# Altium PCB temperture.PcbDoc (part 1 of 2)
Units mil, origin at the board's own origin, x right, y up, seen from the top; angles counter-clockwise.
Board outline 9600 x 6010 mil, 2 copper layers (Top Layer, Bottom Layer); 151 components, 110 nets, 697 pads, 117 vias.
Unrouted connection lines stored in the file: 3.
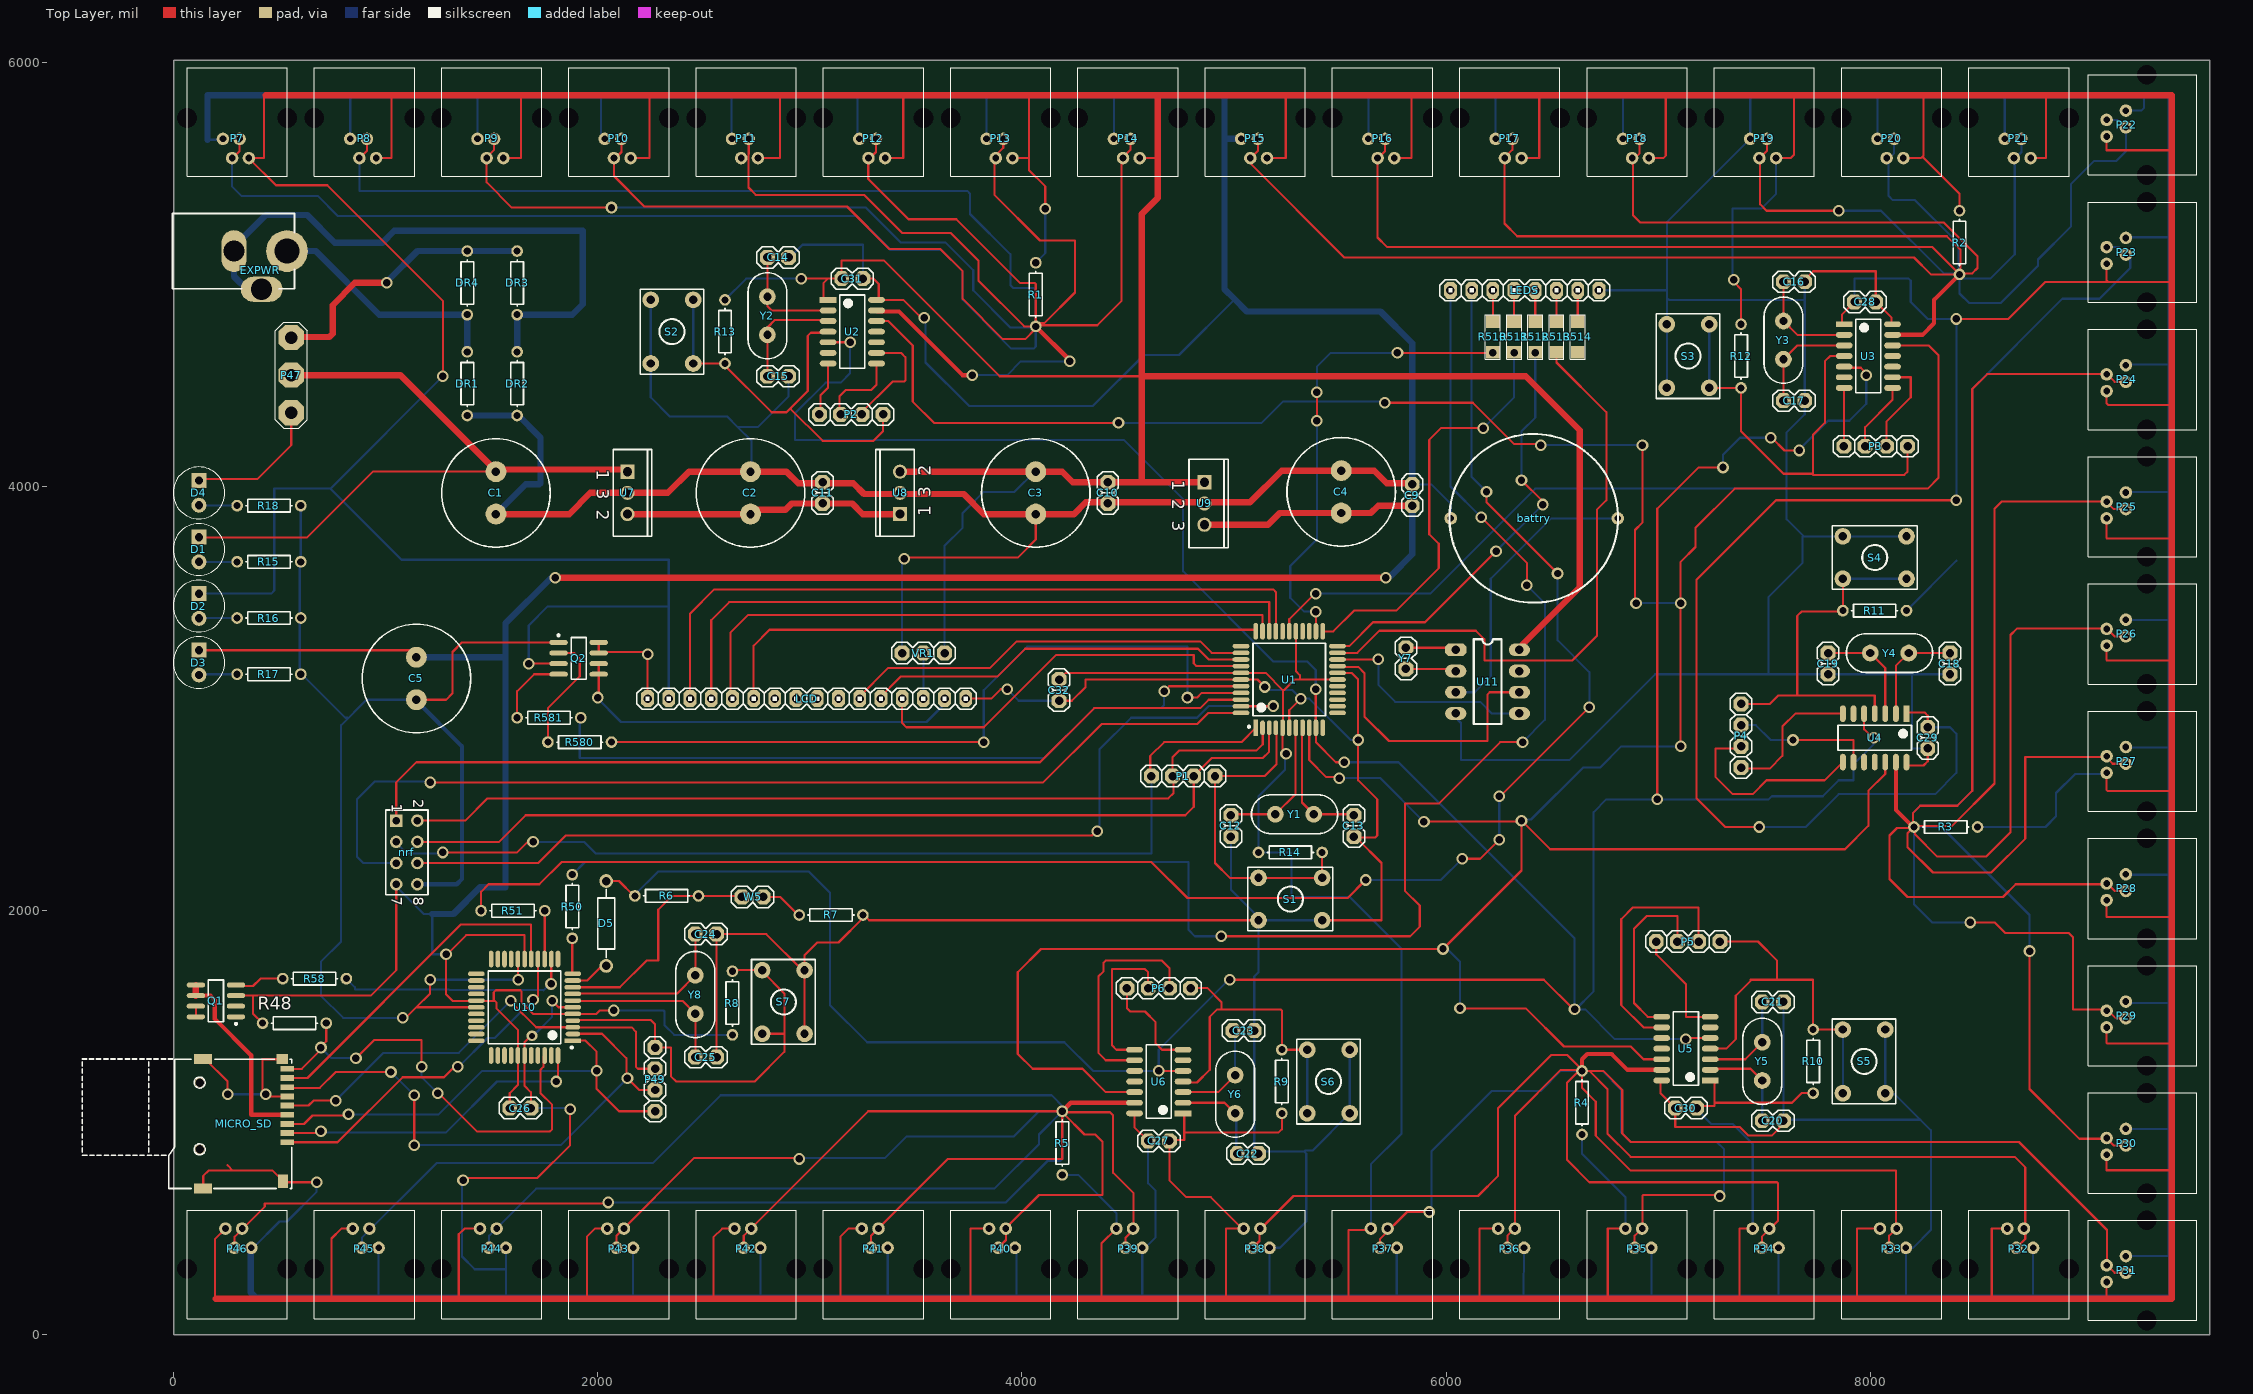
[diagram p0: Top Layer view]
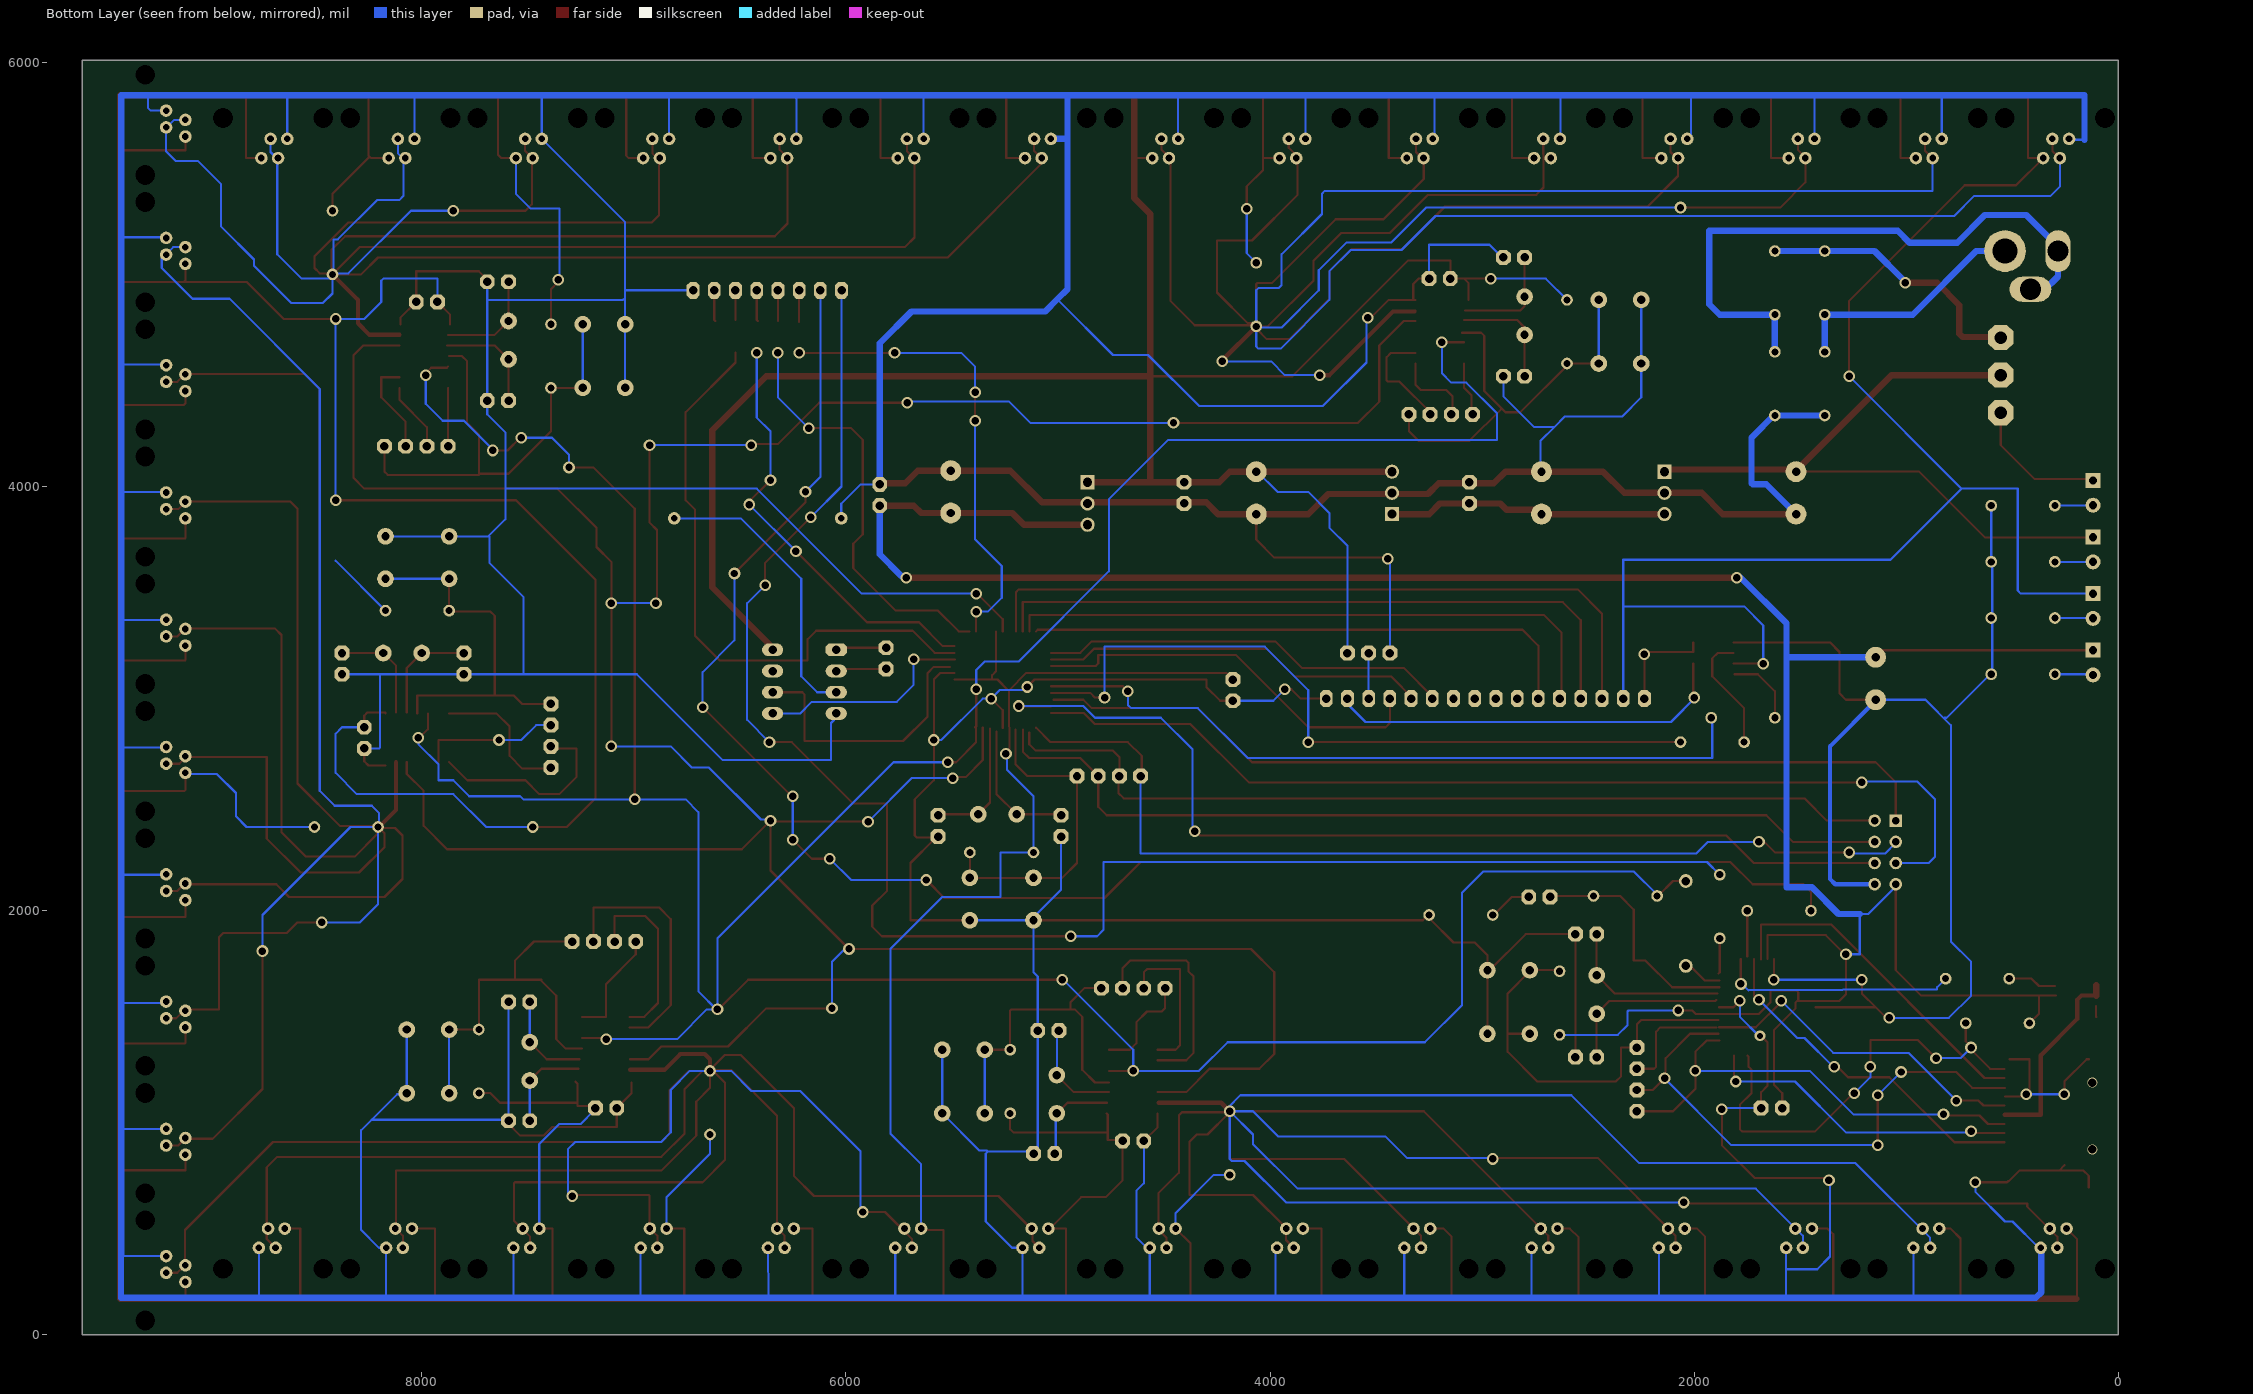
[diagram p1: Bottom Layer view, seen from below]

## Layer stack, top to bottom
Top Layer: signal copper 1.4
Dielectric: dielectric 12.6, FR-4, Dk 4.8
Bottom Layer: signal copper 1.4

## Board outline
0,0 9600,0 9600,6010 0,6010

## Design rules (kind name [scope] priority, off if disabled: settings)
Clearance [All] p1: gap=10
FabricationTestPointUsage TestPointUsage [All] p1: valid=0 allowmultiple=FALSE
FabricationTestpoint Testpoint [(IsPad And (OnTopLayer Or OnBottomLayer))] p1: side=3 testpointundercomponent=TRUE minsize=40 maxsize=100 preferedsize=60 minholesize=0 maxholesize=40 preferedholesize=32 testpointgrid=1 allowsidetop=TRUE allowsidebottom=TRUE usegrid=TRUE gridtolerance=0.01
PolygonConnect [All] p1: connectstyle=Relief reliefconductorwidth=10 reliefentries=4 polygonreliefangle="90 Angle" airgapwidth=10
RoutingVias [All] p1: holewidth=28 width=50 viastyle="Through Hole" minholewidth=28 minwidth=50 maxholewidth=28 maxwidth=50
SilkToSolderMaskClearance SilkscreenOverComponentPads [IsPad] p1: minsilkscreentomaskgap=10 clearancetoexposedcopper=TRUE
SolderMaskExpansion [All] p1: expansion=4
Width [All] p1: maxlimit=10 minlimit=10 preferedwidth=10
25 further rules are at their usual default settings.

## Components (designator, comment, footprint, x,y, rotation, side; value= is the part's Value field where it differs from the comment)
battry "Header 2" Battry 6415,3850 r0 top
C1 "Cap2" cap 1520,3970 r270 top
C2 "Cap2" cap 2720,3970 r90 top
C3 "Cap2" cap 4065,3970 r270 top
C4 "Cap2" cap 5505,3975 r90 top
C5 "Cap2" cap 1145,3095 r270 top
C9 "Cap" H1X02F 5840,3960 r90 top
C10 "Cap" H1X02F 4405,3970 r270 top
C11 "Cap" H1X02F 3060,3970 r90 top
C12 "Cap" H1X02F 4985,2400 r270 top
C13 "Cap" H1X02F 5565,2400 r270 top
C14 "Cap" H1X02F 2850,5080 r0 top
C15 "Cap" H1X02F 2850,4520 r0 top
C16 "Cap" H1X02F 7640,4965 r0 top
C17 "Cap" H1X02F 7640,4405 r0 top
C18 "Cap" H1X02F 8375,3165 r270 top
C19 "Cap" H1X02F 7800,3165 r270 top
C20 "Cap" H1X02F 7540,1010 r0 top
C21 "Cap" H1X02F 7540,1570 r0 top
C22 "Cap" H1X02F 5065,855 r0 top
C23 "Cap" H1X02F 5045,1435 r0 top
C24 "Cap" H1X02F 2510,1890 r0 top
C25 "Cap" H1X02F 2510,1310 r0 top
C26 "Cap" H1X02F 1635,1070 r0 top
C27 "Cap" H1X02F 4645,915 r180 top
C28 "Cap" H1X02F 7975,4870 r0 top
C29 "Cap" H1X02F 8270,2815 r270 top
C30 "Cap" H1X02F 7130,1070 r180 top
C31 "Cap" H1X02F 3200,4980 r0 top
C32 "Cap" H1X02F 4175,3040 r270 top
D1 "LED0" LED5mm 120,3703.33 r270 top
D2 "LED0" LED5mm 120,3436.67 r270 top
D3 "LED0" LED5mm 120,3170 r270 top
D4 "LED0" LED5mm 120,3970 r270 top
D5 "LED0" AXIAL-0.4 2040,1940 r90 top
DR1 "LED0" AXIAL-0.3 1385,4485 r90 top
DR2 "LED0" AXIAL-0.3 1620,4485 r90 top
DR3 "LED0" AXIAL-0.3 1620,4960 r90 top
DR4 "LED0" AXIAL-0.3 1385,4960 r90 top
EXPWR "PWR2.5" JACK1 410,5020 r0 top
LCD "Header 16" H1X16F 2985,3000 r180 top
LEDS "Header 8" H1X08F 6370,4925 r0 top
MICRO_SD "MicroSD" MicroSD_1 330,995 r270 top
nrf "Header 4X2" HDR2X4 1050,2425 r270 top
P1 "Header 4" H1X04F 4760,2635 r0 top
P2 "Header 4" H1X04F 3195,4340 r0 top
P3 "Header 4" H1X04F 8025,4190 r0 top
P4 "Header 4" H1X04F 7390,2825 r90 top
P5 "Header 4" H1X04F 7140,1855 r0 top
P6 "Header 4" H1X04F 4645,1635 r0 top
P7 "Header 4" RJ11 300,5635 r0 top
P8 "Header 4" RJ11 900,5635 r0 top
P9 "Header 4" RJ11 1500,5635 r0 top
P10 "Header 4" RJ11 2100,5635 r0 top
P11 "Header 4" RJ11 2700,5635 r0 top
P12 "Header 4" RJ11 3300,5635 r0 top
P13 "Header 4" RJ11 3900,5635 r0 top
P14 "Header 4" RJ11 4500,5635 r0 top
P15 "Header 4" RJ11 5100,5635 r0 top
P16 "Header 4" RJ11 5700,5635 r0 top
P17 "Header 4" RJ11 6300,5635 r0 top
P18 "Header 4" RJ11 6900,5635 r0 top
P19 "Header 4" RJ11 7500,5635 r0 top
P20 "Header 4" RJ11 8100,5635 r0 top
P21 "Header 4" RJ11 8700,5635 r0 top
P22 "Header 4" RJ11 9200,5705 r270 top
P23 "Header 4" RJ11 9200,5105 r270 top
P24 "Header 4" RJ11 9200,4505 r270 top
P25 "Header 4" RJ11 9200,3905 r270 top
P26 "Header 4" RJ11 9200,3305 r270 top
P27 "Header 4" RJ11 9200,2705 r270 top
P28 "Header 4" RJ11 9200,2105 r270 top
P29 "Header 4" RJ11 9200,1505 r270 top
P30 "Header 4" RJ11 9200,905 r270 top
P31 "Header 4" RJ11 9200,305 r270 top
P32 "Header 4" RJ11 8700,415 r180 top
P33 "Header 4" RJ11 8100,415 r180 top
P34 "Header 4" RJ11 7500,415 r180 top
P35 "Header 4" RJ11 6900,415 r180 top
P36 "Header 4" RJ11 6300,415 r180 top
P37 "Header 4" RJ11 5700,415 r180 top
P38 "Header 4" RJ11 5100,415 r180 top
P39 "Header 4" RJ11 4500,415 r180 top
P40 "Header 4" RJ11 3900,415 r180 top
P41 "Header 4" RJ11 3300,415 r180 top
P42 "Header 4" RJ11 2700,415 r180 top
P43 "Header 4" RJ11 2100,415 r180 top
P44 "Header 4" RJ11 1500,415 r180 top
P45 "Header 4" RJ11 900,415 r180 top
P46 "Header 4" RJ11 300,415 r180 top
P47 "switch" peymanswitch 555,4525 r270 top
P49 "Header 4" H1X04F 2270,1205 r90 top
Q1 "IRF7317" SO-8_N 200,1575 r180 top
Q2 "IRF7317" SO-8_N 1910,3190 r0 top
R1 "Res1" AXIAL-0.3 4065,4905 r90 top
R2 "Res1" AXIAL-0.3 8420,5150 r90 top
R3 "Res1" AXIAL-0.3 8355,2395 r0 top
R4 "Res1" AXIAL-0.3 6640,1095 r270 top
R5 "Res1" AXIAL-0.3 4190,905 r270 top
R6 "Res1" AXIAL-0.3 2325,2070 r0 top
R7 "Res1" AXIAL-0.3 3100,1980 r0 top
R8 "Res1" AXIAL-0.3 2635,1565 r90 top
R9 "Res1" AXIAL-0.3 5225,1195 r270 top
R10 "Res1" AXIAL-0.3 7730,1290 r270 top
R11 "Res1" AXIAL-0.3 8020,3415 r0 top
R12 "Res1" AXIAL-0.3 7390,4615 r90 top
R13 "Res1" AXIAL-0.3 2600,4730 r90 top
R14 "Res1" AXIAL-0.3 5265,2275 r0 top
R15 "Res1" AXIAL-0.3 450,3645 r180 top
R16 "Res1" AXIAL-0.3 450,3380 r180 top
R17 "Res1" AXIAL-0.3 450,3115 r180 top
R18 "Res1" AXIAL-0.3 450,3910 r180 top
R48 "Res1" AXIAL-0.3 570,1470 r0 top
R50 "Res1" AXIAL-0.3 1880,2020 r90 top
R51 "Res1" AXIAL-0.3 1600,2000 r180 top
R58 "Res1" AXIAL-0.3 665,1680 r180 top
R510 "Res1" SMD[1206] 6220,4705 r90 top
R511 "Res1" SMD[1206] 6320,4705 r90 top
R512 "Res1" SMD[1206] 6420,4705 r90 top
R513 "Res1" SMD[1206] 6520,4705 r90 top
R514 "Res1" SMD[1206] 6620,4705 r90 top
R580 "Res1" AXIAL-0.3 1915,2795 r180 top
R581 "Res1" AXIAL-0.3 1770,2910 r180 top
S1 "SW-PB" PB4 5265,2055 r270 top
S2 "SW-PB" PB4 2350,4730 r0 top
S3 "SW-PB" PB4 7140,4615 r0 top
S4 "SW-PB" PB4 8020,3665 r270 top
S5 "SW-PB" PB4 7970,1290 r180 top
S6 "SW-PB" PB4 5445,1195 r0 top
S7 "SW-PB" PB4 2875,1570 r180 top
U1 "ATmega32-16AC" TQFP44 5260,3090 r90 top
U2 "ATtiny24V-10SSU" SOIC14 3200,4730 r0 top
U3 "ATtiny24V-10SSU" SOIC14 7990,4615 r0 top
U4 "ATtiny24V-10SSU" SOIC14 8020,2815 r270 top
U5 "ATtiny24V-10SSU" SOIC14 7130,1350 r180 top
U6 "ATtiny24V-10SSU" SOIC14 4645,1195 r180 top
U7 "L7809ABV" TO220ABN 2140,3970 r270 top
U8 "L7805ABV" TO220ABN 3425,3970 r90 top
U9 "LF33ABV" TO-220A 4860,3920 r270 top
U10 "ATmega32-16AC" TQFP44 1655,1545 r180 top
U11 "ds1307" DIP8-1 6195,3080 r0 top
VR1 "Res Tap" H1X03F 3535,3215 r0 top
W5 "Jumper" H1X02F 2730,2065 r180 top
Y1 "XTAL" CRYSTALL 5285,2455 r180 top
Y2 "XTAL" CRYSTALL 2800,4805 r90 top
Y3 "XTAL" CRYSTALL 7590,4690 r90 top
Y4 "XTAL" CRYSTALL 8090,3215 r0 top
Y5 "XTAL" CRYSTALL 7490,1290 r270 top
Y6 "XTAL" CRYSTALL 5005,1135 r270 top
Y7 "XTAL" H1X02F 5810,3190 r270 top
Y8 "XTAL" CRYSTALL 2460,1605 r270 top

## Footprints (in the part's own frame and the unit in brackets; to place one, negate y for a bottom-side part, rotate by r counter-clockwise, add the part's x,y. Pads: shape width x height; smd on the part's side, far side on the other; paste and mask are expansions set on the pad)
AXIAL-0.3 [mm] "Axial Device, Thru-Hole; 2 Leads; 0.3 in Pin Spacing"
  round 1.4 hole 0.85: 1(-3.81,0) 2(3.81,0)
  silkscreen extent -2.77,-0.76 2.77,0.76
AXIAL-0.4 [mil]
  round 65 hole 40: 1(-200,0) 2(200,0)
  silkscreen extent -160,-40 160,40
Battry [mil]
  round 59.06 hole 30: 1(393.7,0)
  round 60 hole 30: 2(-393.7,0)
  silkscreen extent -400,-398 395,398
cap [mm]
  round 2.5 hole 1: 1(-2.54,0) 2(2.54,0)
  silkscreen extent -6.5,-6.5 6.5,6.5
CRYSTALL [mm]
  round 2 hole 1: 1(-2.293,0) 2(2.293,0)
  silkscreen extent -5.16,-2.32 5.16,2.32
DIP8-1 [mil]
  oct 100x60 hole 40: 1(-150,150)
  oval 100x60 hole 40: 2(-150,50) 3(-150,-50) 4(-150,-150) 5(150,-150) 6(150,-50) 7(150,50) 8(150,150)
  silkscreen extent -65,-200 65,200
H1X02F [mil]
  oct 70x70 hole 40: 1(-50,0) 2(50,0)
  silkscreen extent -100,-50 100,50
H1X03F [mil]
  oct 70x70 hole 40: 1(-100,0) 2(0,0) 3(100,0)
  silkscreen extent -150,-50 150,50
H1X04F [mil]
  oct 70x70 hole 40: 1(-150,0) 2(-50,0) 3(50,0) 4(150,0)
  silkscreen extent -200,-50 200,50
H1X08F [mil]
  oct 60x80 hole 40: 1(-350,0) 2(-250,0) 3(-150,0) 4(-50,0) 5(50,0) 6(150,0) 7(250,0) 8(350,0)
  silkscreen extent -400,-50 400,50
H1X16F [mil]
  oct 60x80 hole 40: 1(-750,0) 2(-650,0) 3(-550,0) 4(-450,0) 5(-350,0) 6(-250,0) 7(-150,0) 8(-50,0) 9(50,0) 10(150,0) 11(250,0) 12(350,0) 13(450,0) 14(550,0) 15(650,0) 16(750,0)
  silkscreen extent -800,-50 800,50
HDR2X4 [mm] "Connector; Header; 4x2 Position"
  rect 1.5x1.5 hole 0.9: 1(0,0)
  round 1.5 hole 0.9: 2(0,2.54) 3(2.54,0) 4(2.54,2.54) 5(5.08,0) 6(5.08,2.54) 7(7.62,0) 8(7.62,2.54)
  silkscreen extent -1.27,-1.27 8.89,3.81
JACK1 [mm]
  round 5 hole 3: 1(3.175,2.286)
  oval 3x5 hole 2.54: 2(-3.175,2.286)
  oval 5x3 hole 2.54: 3(0.127,-2.286)
  silkscreen extent -10.52,-2.21 4.07,6.79
LED5mm [mm]
  rect 1.8x1.8 hole 1: 1(-1.479,0)
  round 1.8 hole 1: 2(1.48,0)
  silkscreen extent -3.1,-3.1 3.1,3.1
MicroSD_1 [mm]
  round 1.2 hole 1: 0(-4.95,-5.25) 0(3.05,-5.25)
  rect 0.7x1.6 smd: 1(2.2,5.25) 2(1.1,5.25) 3(0,5.25) 4(-1.1,5.25) 5(-2.2,5.25) 6(-3.3,5.25) 7(-4.4,5.25) 8(-5.5,5.25) 9(-6.6,5.25)
  rect 1.2x1.4 smd: sh1(-7.75,4.65)
  rect 1.2x2.2 smd: sh2(-7.75,-4.85) sh3(7.75,-4.85)
  rect 1.6x1.2 smd: sh4(6.85,4.75)
  silkscreen extent -7.77,-19.32 7.74,5.77
PB4 [mm]
  round 2 hole 1: 1(2.54,3.81) 1(2.54,-3.81) 2(-2.54,3.81) 2(-2.54,-3.81)
  silkscreen extent -3.81,-5.08 3.81,5.08
peymanswitch [mm]
  oct 3x3 hole 1.5: 1(-4.5,0) 2(0,0) 3(4.5,0)
  silkscreen extent -6.35,-1.91 6.35,1.91
RJ11 [mm]
  round 1.5 hole 0.8: 1(1.4,-2.2) 2(0.3,0.1) 3(-0.6,-2.2) 4(-1.7,0.1)
  round 0 hole 2.36 unplated: shild(-6,2.6) shild(6,2.6)
  silkscreen extent -6,-4.4 6,8.6
SMD[1206] [mil]
  rect 60x65 smd: 1(-72.5,0) 2(72.5,0)
  silkscreen extent -105,-35 105,35
SO-8_N [mm] "SOIC, 8-Leads, Body 4.9x3.9mm, Pitch 1.27mm, IPC Medium Density"
  oval 2.2x0.6 smd: 1(-2.4,1.905) 2(-2.4,0.635) 3(-2.4,-0.635) 4(-2.4,-1.905) 5(2.4,-1.905) 6(2.4,-0.635) 7(2.4,0.635) 8(2.4,1.905)
  silkscreen extent -2.53,-2.5 0.9,2.88, body extent -1.95,-2.45 1.95,2.45, height 1.75
SOIC14 [mm]
  rect 2x0.7 smd: 1(-2.9,3.81)
  oval 2x0.7 smd: 2(-2.9,2.54) 3(-2.9,1.27) 4(-2.9,0) 5(-2.9,-1.27) 6(-2.9,-2.54) 7(-2.9,-3.81) 8(2.9,-3.81) 9(2.9,-2.54) 10(2.9,-1.27) 11(2.9,0) 12(2.9,1.27) 13(2.9,2.54) 14(2.9,3.81)
  silkscreen extent -1.5,-4.4 1.5,4.4, body extent -2,-4.38 2,4.38, height 1.73
TO220ABN [mm] "TO, Thru-Hole, Vertical, Heatsink Mounted; 3 In-Line Leads; Pitch 2.54 mm; Pin sequence 1, 3, 2"
  rect 1.7x1.7 hole 1.1: 1(-2.54,0)
  round 1.7 hole 1.1: 2(2.54,0) 3(0,0)
  silkscreen extent -5.2,-1.7 5.2,2.9
TO-220A [mm] "TO, Thru-Hole, Vertical, Heatsink Mounted; 3 In-Line Leads; Pitch 2.54 mm"
  rect 1.7x1.7 hole 1.1: 1(-2.54,0)
  round 1.7 hole 1.1: 2(0,0) 3(2.54,0)
  silkscreen extent -5.3,-1.85 5.3,2.85
TQFP44 [mm]
  rect 2x0.55 smd: 1(-5.775,4)
  oval 1.75x0.55 smd: 2(-5.775,3.2) 3(-5.775,2.4) 4(-5.775,1.6)
  oval 2x0.55 smd: 5(-5.775,0.8) 6(-5.775,0) 7(-5.775,-0.8) 8(-5.775,-1.6) 9(-5.775,-2.4) 10(-5.775,-3.2) 11(-5.775,-4) 23(5.775,-4) 24(5.775,-3.2) 25(5.775,-2.4) 26(5.775,-1.6) 27(5.775,-0.8) 28(5.775,0) 29(5.775,0.8) 30(5.775,1.6) 31(5.775,2.4) 32(5.775,3.2) 33(5.775,4)
  oval 0.55x2 smd: 12(-4,-5.775) 13(-3.2,-5.775) 14(-2.4,-5.775) 15(-1.6,-5.775) 16(-0.8,-5.775) 17(0,-5.775) 18(0.8,-5.775) 19(1.6,-5.775) 20(2.4,-5.775) 21(3.2,-5.775) 22(4,-5.775) 34(4,5.775) 35(3.2,5.775) 36(2.4,5.775) 37(1.6,5.775) 38(0.8,5.775) 39(0,5.775) 40(-0.8,5.775) 41(-1.6,5.775) 42(-2.4,5.775) 43(-3.2,5.775) 44(-4,5.775)
  silkscreen extent -5.77,-4.35 4.35,4.95, body extent -5,-5 5,5, height 1.2

## Part data
battry: "Header, 2-Pin"
C1 C2 C3 C4 C5 C9 C10 C11 C12 C13 C14 C15 C16 C17 C18 C19 C20 C21 C22 C23 C24 C25 C26 C27 C28 C29 C30 C31 C32: "Capacitor"
D1 D2 D3 D4 D5 DR1 DR2 DR3 DR4: "Typical INFRARED GaAs LED"
EXPWR: "Low Voltage Power Supply Connector"
LCD: "Header, 16-Pin"
LEDS: "Header, 8-Pin"
MICRO_SD: "MicroSD_altium designer (M.Hariri)"
nrf: "Header, 4-Pin, Dual row"
P1 P2 P3 P4 P5 P6 P7 P8 P9 P10 P11 P12 P13 P14 P15 P16 P17 P18 P19 P20 P21 P22 P23 P24 P25 P26 P27 P28 P29 P30 P31 P32 P33 P34 P35 P36 P37 P38 P39 P40 P41 P42 P43 P44 P45 P46 P49: "Header, 4-Pin"
P47: library part "Header 3", "Header, 3-Pin"
Q1 Q2: "HEXFET Power MOSFET"
R1 R2 R3 R4 R5 R6 R7 R8 R9 R10 R11 R12 R13 R14 R15 R16 R17 R18 R48 R50 R51 R58 R510 R511 R512 R513 R514 R580 R581: "Resistor"
S1 S2 S3 S4 S5 S6 S7: "Switch"
U1 U10: "8-Bit AVR Microcontroller with 32K Bytes of In-System Programmable Flash Memory"
U2 U3 U4 U5 U6: "8-bit AVR Microcontroller, 1.8-5.5V, 2KB Flash, 128 Bytes EEPROM, 128 Bytes SRAM, 14-pin SOIC, Industrial Grade (-40°C to 85°C), Pb-Free"
U7 U8: "Precision 1A Regulator"
U9: "500mA, Very Low Drop (0.45V) Voltage Regulator"
U11: library part Attiny85, "Attiny45"
VR1: "Tapped Resistor"
W5: "Jumper Wire"
Y1 Y2 Y3 Y4 Y5 Y6 Y7 Y8: "Crystal Oscillator"

## Via types
v1: diameter 55, hole 35, Top Layer to Bottom Layer, 116 vias
v2: diameter 50, hole 28, Top Layer to Bottom Layer, 1 vias

## Nets (pads, with @x,y where several pads share a name; then routed paths per layer and width w, separated by ;. In a path a pad name is that pad's centre, name@x,y a point inside that pad or via, vN(x,y) a via of type N, cw(c..) or ccw(c..) an arc to the next point about the centre after c; other vN are vias at no path point)
3.3: C4.1 C5.1 C9.1 C26.1 D3.1 nrf.7 Q1.3 R8.1 R48.1 U9.3 U10.5 U10.17 U10.27 U10.38 | length 13338.2
  Top Layer w10: D3.1@120,3228.25 1116.75,3228.25 C5.1@1140,3205 ; Q1.3@294.49,1600 375,1600 ; R48.1@420,1470 375,1515 375,1600 ; nrf.7@1050,2110 1050,1720 930,1600 375,1600 ; v1(1285,1795) 1285,1605 1315,1575 1510,1575 ; v1@1295,1800 1380,1885 1655,1885 U10.17@1655,1772.36 ; C26.1@1585,1070 1585,1140 1623.5,1178.5 U10.38@1623.5,1317.64 1623.5,1438.5 1522.01,1540 1522.01,1567.99 1515,1575 1510,1575 ; v1@2060,1530 2010,1530 1993.5,1513.5 U10.5@1882.36,1513.5 1696.5,1513.5 1640,1570 1640,1620 1635,1625 1520,1625 1510,1615 1510,1575
  Top Layer w30: v1@1815,3570 v1@5695,3570 ; U9.3@4860,3820 5160,3820 5215,3875 C4.1@5505,3875 5645,3875 5680,3910 C9.1@5830,3910
  Bottom Layer w10: nrf.7@1032.5,2132.5 1180,1985 1220,1985 1220,1795 v1(1285,1795) ; 1555,3195 1560,3190 ; v1@2085,1530 2310,1530 2315,1525 2315,1460 2360,1415 R8.1@2635,1415 ; C9.1@5840,3910 C9.1@5855,3895
  Bottom Layer w30: C5.1@1145,3195 1555,3195 ; 1220,1985 1320,1985 1445,2110 1565,2110 1565,3355 v1@1780,3570 ; v1@5740,3580 5840,3680 C9.1@5840,3910
  other v1: 2075,1530 1800,3570 5715,3570
5: C3.1 C10.1 C27.1 C28.1 C29.1 C30.1 C31.1 C32.1 D2.1 LCD.15 P7.1 P8.1 P9.1 P10.1 P11.1 P12.1 P13.1 P14.1 P15.1 P16.1 P17.1 P18.1 P19.1 P20.1 P21.1 P22.1 P23.1 P24.1 P25.1 P26.1 P27.1 P28.1 P29.1 P30.1 P31.1 P32.1 P33.1 P34.1 P35.1 P36.1 P37.1 P38.1 P39.1 P40.1 P41.1 P42.1 P43.1 P44.1 P45.1 P46.1 Q2.3 R1.2 R2.2 R3.2 R4.2 R5.2 R9.2 R10.2 R11.2 R12.2 R13.2 R14.1 U1.5 U1.17 U1.27 U1.38 U2.1 U3.1 U4.1 U5.1 U6.1 U8.2 U9.1 U11.8 VR1.3 | length 73875.5
  Top Layer w10: 195,170 195,451.73 P46.1@244.88,501.61 ; 426.61,5845 426.61,5548.39 P7.1@355.12,5548.39 483.5,5420 725,5420 1270,4875 v1@1270,4535 ; 745,170 745,455 791.61,501.61 P45.1@844.88,501.61 ; P8.1@955.12,5548.39 1028.39,5548.39 1028.39,5843.39 1030,5845 ; 1345,175 1345,475 1371.61,501.61 P44.1@1444.88,501.61 ; P9.1@1555.12,5548.39 1638.39,5548.39 1638.39,5843.39 1640,5845 ; v1(1675,3165) Q2.3@1815.51,3165 ; 1950,170 1950,465 1986.61,501.61 P43.1@2044.88,501.61 ; P10.1@2155.12,5548.39 2243.39,5548.39 2243.39,5843.39 2245,5845 ; 2545,170 2545,460 2586.61,501.61 P42.1@2644.88,501.61 ; P11.1@2755.12,5548.39 2858.39,5548.39 2858.39,5836.61 2855,5840 ; v1@2985,4980 3085,4980 ; U2.1@3065,4880 3065,4960 3085,4980 ; 3145,170 3145,465 3181.61,501.61 P41.1@3244.88,501.61 ; P12.1@3355.12,5548.39 3438.39,5548.39 3440,5550 3440,5840 ; 3755,175 3756.61,176.61 3756.61,501.61 P40.1@3844.88,501.61 ; P13.1@3955.12,5548.39 4033.39,5548.39 ; 4025,5850 4030,5845 4033.39,5841.61 4033.39,5548.39 ; v1@4110,5325 4110,5415 4033.39,5491.61 4033.39,5548.39 ; C32.1@4175,3090 4206.5,3121.5 U1.38@5032.64,3121.5 5148.5,3121.5 5230,3040 ; 4375,175 4375,431.73 P39.1@4444.88,501.61 ; P14.1@4555.12,5548.39 4636.61,5548.39 ; 4565,4520 3895,4520 3350,5065 3150,5065 C31.1@3150,4980 3085,4980 ; U6.1@4770,1045 4765,1040 4765,955 ; 4961.61,166.61 4961.61,501.61 P38.1@5038.39,501.61 ; P38.1@5044.88,501.61 P38.1@5038.39,501.61 ; P15.1@5155.12,5548.39 5243.39,5548.39 5243.39,5836.61 5240,5840 ; R9.2@5225,1045 5225,970 5210,955 4765,955 ; U1.5@5228.5,2862.64 5228.5,2756.5 v1@5230,2755 ; U1.5@5230,2870 5230,3040 ; U1.27@5291.5,3317.36 5291.5,3128.5 5310,3110 5310,3095 ; U1.17@5487.36,3090 5285,3090 5235,3040 5230,3040 ; 5540,170 5540,495 5638.27,495 P37.1@5644.88,501.61 ; P16.1@5755.12,5548.39 5836.61,5548.39 5836.61,5843.39 5835,5845 ; 6155,175 6156.61,176.61 6156.61,501.61 P36.1@6244.88,501.61 ; P17.1@6355.12,5548.39 6438.39,5548.39 6438.39,5841.61 6435,5845 ; 6770,175 6761.61,183.39 6761.61,501.61 P35.1@6844.88,501.61 ; P18.1@6955.12,5548.39 7023.39,5548.39 7035,5560 7035,5840 ; C30.1@7180,1070 7190,1080 7265,1080 7265,1090 ; U5.1@7275,1195 7265,1185 7265,1090 ; v1@7360,4960 7390,4930 R12.2@7390,4765 ; 7380,165 7383.39,168.39 7383.39,501.61 P34.1@7444.88,501.61 ; v1@7460,2395 7315,2395 7180,2530 7180,3560 7555,3935 v1(8405,3935) ; P19.1@7555.12,5548.39 7623.39,5548.39 7640,5565 7640,5845 ; R10.2@7730,1140 7675,1140 7630,1095 7270,1095 7265,1090 ; U3.1@7865,4765 7865,4810 C28.1@7925,4870 ; 7925,170 7936.61,181.61 7936.61,501.61 P33.1@8044.88,501.61 ; P20.1@8155.12,5548.39 8238.39,5548.39 ; U4.1@8170,2930 8170,2935 8255,2935 8270,2920 C29.1@8270,2865 ; 8250,5845 8250,5560 8242.5,5552.5 8247.5,5552.5 8420,5380 R2.2@8420,5300 ; v1(8405,4790) 8650,4790 8825,4965 9120,4965 ; 8570,175 8571.61,176.61 8571.61,501.61 P32.1@8644.88,501.61 ; P21.1@8755.12,5548.39 8828.39,5548.39 8828.39,5833.39 8830,5835 8825,5840 ; 9113.39,171.61 P31.1@9113.39,249.88 ; P30.1@9113.39,849.88 9113.39,776.61 9411.61,776.61 9415,780 ; P29.1@9113.39,1449.88 9113.39,1376.61 9115,1375 9415,1375 9420,1370 ; P28.1@9113.39,2049.88 9113.39,1971.61 9115,1970 9415,1970 9420,1975 ; P27.1@9113.39,2649.88 9113.39,2568.39 9116.77,2565 9415,2565 9420,2570 ; P26.1@9113.39,3249.88 9113.39,3181.61 9115,3180 9420,3180 ; P25.1@9113.39,3849.88 9113.39,3756.61 9115,3755 9420,3755 ; P24.1@9113.39,4449.88 9113.39,4391.61 9120,4385 9415,4385 ; P23.1@9113.39,5049.88 9113.39,4971.61 9120,4965 ; P22.1@9113.39,5649.88 9113.39,5585 9420,5585 ; 9420,4965 9120,4965 ; 4765,955 4765,920 4700,920 C27.1@4695,915 4695,730 4775,650 4890,650 P38.1@5038.39,501.61
  Top Layer w30: 200,170 745,170 1950,170 2545,170 3145,170 5540,170 7925,170 9420,170 9420,1370 9420,1975 9420,2570 9420,3180 9420,3755 9420,4965 9420,5585 9420,5845 8250,5845 7640,5845 6435,5845 5835,5845 4030,5845 2245,5845 1640,5845 1030,5845 435,5845 ; U8.2@3425,4070 4190,4070 4240,4020 C10.1@4405,4020 4565,4020 ; 4640,5840 4640,5360 4565,5285 4565,4520 ; U9.1@4860,4020 4565,4020 ; U11.8@6340,3235 6630,3525 6630,4265 6375,4520 4565,4520 ; 4565,4020 4565,4520
  Bottom Layer w10: D2.1@115,3495 460,3495 475,3510 475,3990 740,3990 ; v1(1270,4520) 740,3990 ; v1(1675,3165) 1675,3345 1765,3435 2330,3435 2335,3430 ; LCD.15@2335,3000 2335,3430 ; R13.2@2600,4880 2700,4980 v1@2940,4980 ; VR1.3@3635,3215 3635,3720 3720,3805 3720,3875 3820,3975 3965,3975 C3.1@4065,4075 ; R1.2@4065,5055 4110,5100 v1@4110,5295 ; R5.2@4190,755 4265,755 4444.88,575.12 P39.1@4444.88,501.61 ; v1@5240,2720 5240,2665 5115,2540 R14.1@5115,2275 5270,2275 5270,2065 5545,2065 5790,1820 5790,950 5644.88,804.88 P37.1@5644.88,501.61 ; R4.2@6640,945 6640,855 6844.88,650.12 P35.1@6844.88,501.61 ; C30.1@7185,1060 7250,995 7350,995 7444.88,900.12 P34.1@7444.88,501.61 ; v1@7350,4985 7350,5310 7485,5310 7555.12,5380.12 P19.1@7555.12,5548.39 ; v1@7495,2395 7695,2395 7850,2550 8305,2550 8405,2650 8405,2835 8375,2865 C29.1@8270,2865 ; C28.1@7925,4875 7925,4980 8180,4980 8190,4970 8190,4870 8270,4790 v1(8405,4790) ; R11.2@8170,3415 8405,3650 ; v1(8405,3935) v1@8405,4785 ; R3.2@8505,2395 8825,2395 8875,2445 8875,2555 8965,2645 P27.1@9110,2645 ; 740,3990 1075,3655 2335,3655 2335,3430
  other v1: 7475,2395 5245,2740 7355,4975 2960,4980 4110,5310
9: C2.1 C11.1 U7.2 U8.1 | length 1326.4
  Top Layer w10: C2.1@2710,3870 C2.1@2730,3890
  Top Layer w30: U7.2@2140,3870 C2.1@2710,3870 ; C2.1@2730,3890 2885,3890 2915,3920 C11.1@3060,3920 3200,3920 3250,3870 U8.1@3425,3870
12: C1.1 D1.1 P47.2 U7.1 | length 3301.9
  Top Layer w10: D1.1@115,3760 630,3760 940,4070 C1.1@1520,4070 ; U7.1@2125,4080 U7.1@2135,4070
  Top Layer w30: P47.2@555,4525 1070,4525 1515,4080 U7.1@2125,4080
BK_POW: R580.1 U1.41 | length 3510.8
  Top Layer w10: R580.1@2065,2785 2075,2795 v1(3820,2795) ; 4810,3005 4825,3005 4847.01,3027.01 U1.41@5032.64,3027.01
  Bottom Layer w10: v1@3820,2805 3820,3040 4025,3245 4780,3245 v1(4780,3005)
BP: LCD.16 Q2.7 Q2.8 | length 499.4
  Top Layer w10: Q2.8@2004.49,3265 2004.49,3220.51 2005,3220 v1@2235,3220 ; LCD.16@2225,2995 LCD.16@2230,3000 ; LCD.16@2235,3000 v1(2235,3210)
  Bottom Layer w30: LCD.16@2235,3000 LCD.16@2240,3005
CARD_INS: MICRO_SD.9 R48.2 U10.42 | length 2123.1
  Top Layer w10: MICRO_SD.9@536.69,1254.84 604.84,1254.84 695,1345 v1(695,1355) ; v1@695,1360 720,1385 R48.2@720,1470 ; v1@865,1310 945,1390 1170,1390 v1(1170,1265) ; v1@1250,1140 1430,960 1775,960 1785,970 1785,1085 1730,1140 1730,1250.76 1743.82,1264.58 1743.82,1311.97 U10.42@1749.49,1317.64
  Bottom Layer w10: v1(695,1355) 745,1305 v1(860,1305) ; v1(1170,1265) 1170,1215 v1(1245,1140)
CE_S: nrf.6 U1.43 | length 4694.8
  Top Layer w10: nrf.6@1150,2225 1720,2225 1850,2355 4330,2355 v1@4350,2375 ; U1.43@5032.64,2964.02 5179.02,2964.02 v1@5180,2965
  Bottom Layer w10: v1@4365,2380 4365,2760 4515,2910 4825,2910 4880,2965 v1(5185,2965)
  other v1: 4355,2375
CSN_S: nrf.5 U1.44 | length 4780.1
  Top Layer w10: nrf.5@1040,2235 nrf.5@1050,2225 ; v1@1235,2605 4100,2605 4375,2880 4825,2880 4877.52,2932.52 U1.44@5032.64,2932.52
  Bottom Layer w10: nrf.5@1050,2225 895,2225 865,2255 865,2525 950,2610 v1@1195,2610
  other v1: 1210,2605
D1: MICRO_SD.8 U10.16 | length 1613
  Top Layer w10: MICRO_SD.8@536.69,1211.54 631.54,1211.54 1355,1935 1685,1935 U10.16@1685,1770
D2: MICRO_SD.1 U10.15 | length 1602.2
  Top Layer w10: MICRO_SD.1@536.69,908.39 773.39,908.39 1080,1215 1275,1215 v1@1325,1265 ; v1@1710,1590 1717.99,1597.99 U10.15@1717.99,1772.36
  Bottom Layer w10: v1@1345,1265 1480,1400 1515,1400 v1(1695,1580)
  other v1: 1340,1265
D4: LCD.11 U1.33 | length 2641.7
  Top Layer w10: LCD.11@2735,3010 2735,3250 2810,3325 5094.88,3325 U1.33@5102.52,3317.36
D5: LCD.12 U1.32 | length 2931.9
  Top Layer w10: LCD.12@2625,3000 2625,3310 2710,3395 5134.02,3395 U1.32@5134.02,3317.36
D6: LCD.13 U1.31 | length 3174.1
  Top Layer w10: LCD.13@2535,3000 2535,3370 2620,3455 5165,3455 5165.51,3455.51 U1.31@5165.51,3317.36
D7: LCD.14 U1.30 | length 3400.2
  Top Layer w10: LCD.14@2435,3000 2435,3400 2550,3515 5185,3515 5197.01,3502.99 U1.30@5197.01,3317.36
DATA1: P7.2 P7.3 P8.2 P8.3 P9.2 P9.3 P10.2 P10.3 P11.2 P11.3 P12.2 P12.3 P13.2 P13.3 P14.2 P14.3 R1.1 U2.13 | length 21293.6
  Top Layer w10: P7.3@275,5545 311.81,5581.81 P7.2@311.81,5638.94 ; P8.3@875,5545 911.81,5581.81 P8.2@911.81,5638.94 ; P9.3@1475,5550 1511.81,5586.81 P9.2@1511.81,5638.94 ; P9.3@1476.38,5548.39 1476.38,5433.62 1595,5315 v1(2065,5315) ; P10.3@2076.38,5548.39 2076.38,5463.62 2220,5320 3175,5320 3375,5120 3615,5120 3720,5015 3720,4885 3910,4695 4015,4695 R1.1@4060,4740 ; P10.3@2080,5545 2111.81,5576.81 P10.2@2111.81,5638.94 ; P11.2@2711.81,5638.94 2711.81,5568.05 2710.59,5566.83 2710.59,5409.41 2745,5375 3255,5375 3435,5195 3665,5195 3795,5065 3795,4970 4010,4755 R1.1@4060,4755 ; P12.2@3311.81,5638.94 3311.81,5576.81 3275,5540 3275,5450 3465,5260 3690,5260 3990,4960 4060,4960 4065,4955 R1.1@4065,4770 ; U2.13@3314.17,4830 U2.13@3319.17,4825 ; P13.2@3911.81,5638.94 3911.81,5596.81 3870,5555 3870,5375 4085,5160 4250,5160 4250,4915 4105,4770 R1.1@4065,4770 ; R1.1@4045,4760 R1.1@4065,4760 ; R1.1@4055,4770 R1.1@4065,4770 ; R1.1@4065,4755 R1.1@4060,4755 ; P14.2@4511.81,5638.94 4511.81,5586.81 4470,5545 4470,4875 4355,4760 R1.1@4065,4760 ; R1.1@4060,4755 R1.1@4065,4760 ; R1.1@4065,4760 R1.1@4065,4770
  Top Layer w20: U2.13@3319.17,4825 3420,4825 3720,4525 v1@3745,4525 ; R1.1@4065,4755 v1@4225,4595
  Bottom Layer w10: P7.3@276.38,5548.39 276.38,5413.62 320,5370 680,5370 775,5275 3220,5275 3380,5115 3620,5115 3720,5015 3720,4880 3950,4650 4055,4650 4065,4660 R1.1@4065,4750 ; P8.3@876.38,5548.39 876.38,5393.62 3741.38,5393.62 3755,5380 3755,5285 3945,5095 3945,4950 3960,4935 4055,4935 4065,4925 4065,4765 R1.1@4070,4760 ; v1(2065,5315) 3265,5315 3430,5150 3640,5150 3770,5020 3770,4925 3945,4750 R1.1@4060,4750 ; v1(3765,4525) 3930,4525 3995,4590 v1(4225,4590)
DATA2: P15.2 P15.3 P16.2 P16.3 P17.2 P17.3 P18.2 P18.3 P19.2 P19.3 P20.2 P20.3 P21.2 P21.3 P22.2 P22.3 R2.1 U3.13 | length 17071.7
  Top Layer w10: P15.2@5111.81,5638.94 5111.81,5581.81 5065,5535 5520,5080 8205,5080 8285,5000 R2.1@8420,5000 ; P16.3@5675,5545 P16.3@5676.38,5546.38 ; P16.3@5676.38,5548.39 P16.3@5676.38,5546.38 ; P16.2@5711.81,5638.94 5711.81,5581.81 P16.3@5676.38,5546.38 ; P17.2@6311.81,5638.94 6311.81,5586.81 6275,5550 6275,5240 6335,5180 8360,5180 8425,5115 R2.1@8425,5010 ; P18.2@6911.81,5638.94 6911.81,5571.81 6880,5540 6880,5280 6915,5245 8345,5245 8505,5085 8505,5030 8480,5005 R2.1@8435,5005 ; P19.2@7511.81,5638.94 7511.81,5581.81 7480,5550 7480,5330 7510,5300 v1@7835,5300 ; R2.1@8415,5005 8290,5130 5720,5130 5676.38,5173.62 P16.3@5676.38,5546.38
  Top Layer w20: U3.13@8104.17,4715 8245,4715 8300,4770 8300,4880 R2.1@8420,5000
  Bottom Layer w10: v1(7850,5300) 8050,5300 8345,5005 R2.1@8415,5005 ; P20.2@8111.81,5638.94 8111.81,5571.81 8085,5545 8085,5370 8105,5350 8210,5350 8395,5165 8415,5165 R2.1@8415,5005 ; R2.1@8420,4985 8420,4910 8465,4865 8615,4865 8790,5040 8790,5070 8945,5225 8945,5425 9055,5535 9160,5535 9205,5580 9205,5690 9166.38,5728.62 P22.3@9113.39,5728.62 ; R2.1@8420,4995 8435,4980 8565,4980 8680,5095 8680,5545 8711.81,5576.81 P21.2@8711.81,5638.94 ; R2.1@8420,5000 R2.1@8415,5005 ; R2.1@8425,5005 R2.1@8415,5005
DATA3: P23.2 P23.3 P24.2 P24.3 P25.2 P25.3 P26.2 P26.3 P27.2 P27.3 P28.2 P28.3 P29.2 P29.3 P30.2 P30.3 R3.1 U4.13 | length 18284
  Top Layer w10: R3.1@8190,2390 8125,2390 8090,2355 8090,2150 8175,2065 8625,2065 8685,2125 9120,2125 9151.81,2093.19 P28.2@9203.94,2093.19 ; R3.1@8200,2390 8175,2365 8175,2300 8295,2180 8570,2180 8730,2340 8730,2725 9110,2725 9141.81,2693.19 P27.2@9203.94,2693.19 ; R3.1@8205,2395 8200,2395 8200,2460 8235,2495 8410,2495 8480,2565 8480,4460 8550,4530 9115,4530 9151.81,4493.19 P24.2@9203.94,4493.19 ; R3.1@8210,2390 8210,2360 8315,2255 8545,2255 8660,2370 8660,3300 8690,3330 9115,3330 9151.81,3293.19 P26.2@9203.94,3293.19 ; R3.1@8215,2395 8220,2400 8385,2400 8585,2600 8585,3895 8620,3930 9110,3930 9146.81,3893.19 P25.2@9203.94,3893.19 ; v1@8485,1945 8585,1945 8635,1895 8935,1895 8955,1875 8955,1535 9115,1535 9156.81,1493.19 P29.2@9203.94,1493.19 ; v1@8750,1790 8750,1160 8985,925 9115,925 9146.81,893.19 P30.2@9203.94,893.19
  Top Layer w20: U4.13@8120,2700 8120,2475 R3.1@8200,2395
  Bottom Layer w10: R3.1@8200,2395 8200,2460 8235,2495 8410,2495 8480,2565 8480,4460 8905,4885 9080,4885 9225,5030 9225,5075 9171.38,5128.62 P23.3@9113.39,5128.62 ; v1@8457.5,1945 8290,1945 8205,2030 R3.1@8205,2395 8335,2395 8750,1980 v1@8750,1825
  other v1: 8750,1810 8470,1945
DATA4: P31.2 P31.3 P32.2 P32.3 P33.2 P33.3 P34.2 P34.3 P35.2 P35.3 P36.2 P36.3 P37.2 P37.3 P38.2 P38.3 R4.1 U5.13 | length 16860.5
  Top Layer w10: P38.2@5088.19,411.06 5120,442.87 5120,495 5280,655 6150,655 6245,750 6245,1070 6495,1320 6570,1320 6640,1250 6540,1250 6325,1035 6325,505 6288.19,468.19 P36.2@6288.19,411.06 ; P37.2@5688.19,411.06 5688.19,453.19 5815,580 v1@5910,580 ; P35.2@6888.19,411.06 6888.19,468.19 6925,505 6925,655 6930,660 v1@7265,660 ; P34.2@7488.19,411.06 7488.19,463.19 7565,540 7565,715 7560,720 6675,720 6570,825 6570,1190 6620,1240 R4.1@6640,1240 ; P33.2@8088.19,411.06 8088.19,468.19 8120,500 8120,775 6870,775 6705,940 6705,1100 6640,1165 R4.1@6640,1240 ; P32.2@8688.19,411.06 8730,452.87 8730,790 8680,840 6870,840 6760,950 6760,1160 6675,1245 ; P31.2@9203.94,293.19 9151.81,293.19 9115,330 9115,495 8700,910 6870,910 6830,950 6830,1155 6740,1245 6675,1245 ; R4.1@6640,1240 6645,1245 6675,1245
  Top Layer w20: R4.1@6640,1250 6640,1300 6665,1325 6780,1325 6855,1250 U5.13@7015.83,1250
  Bottom Layer w10: v1@5930,590 5930,865 6215,1150 6445,1150 6540,1245 R4.1@6640,1245 6735,1245 6825,1155 6825,955 6870,910 7275,910 7310,875 v1@7310,660
  other v1: 5920,580 7290,655